# Altium PCB PCB1.PcbDoc
Units mil, origin at the board's own origin, x right, y up, seen from the top; angles counter-clockwise.
Board outline 1940 x 1145 mil, 2 copper layers (Top Layer, Bottom Layer); 9 components, 11 nets, 35 pads, 1 vias.
Unrouted connection lines stored in the file: 4.
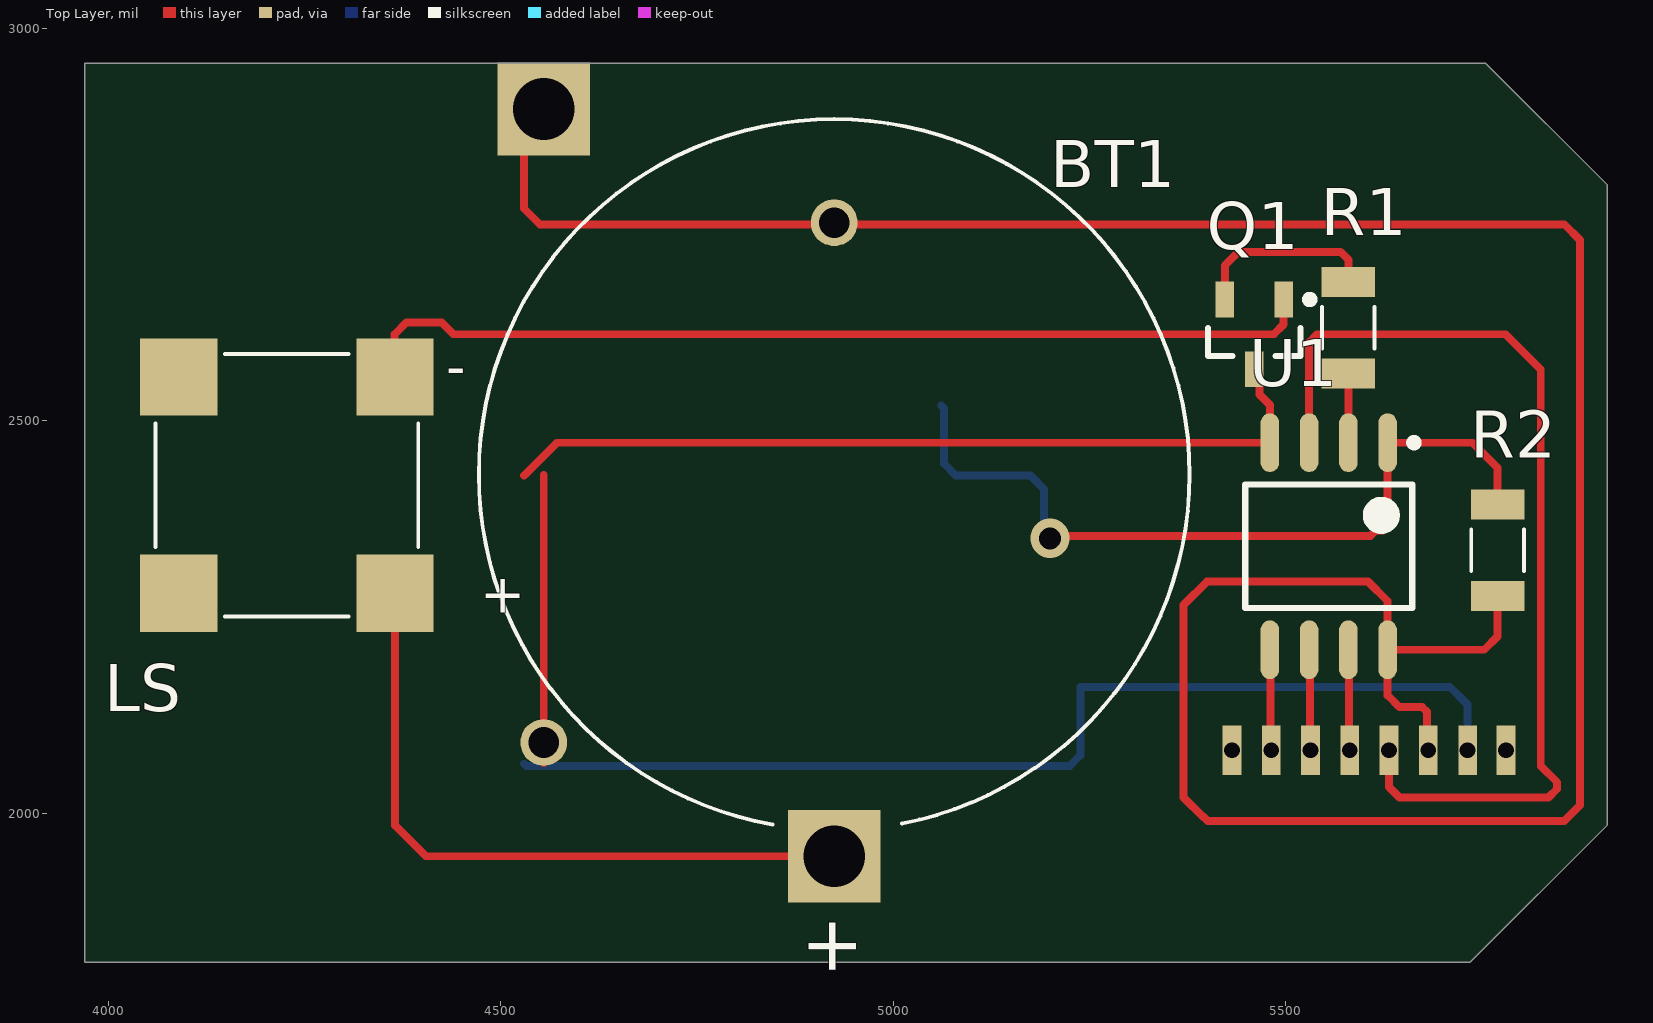
[diagram p0: Top Layer view]
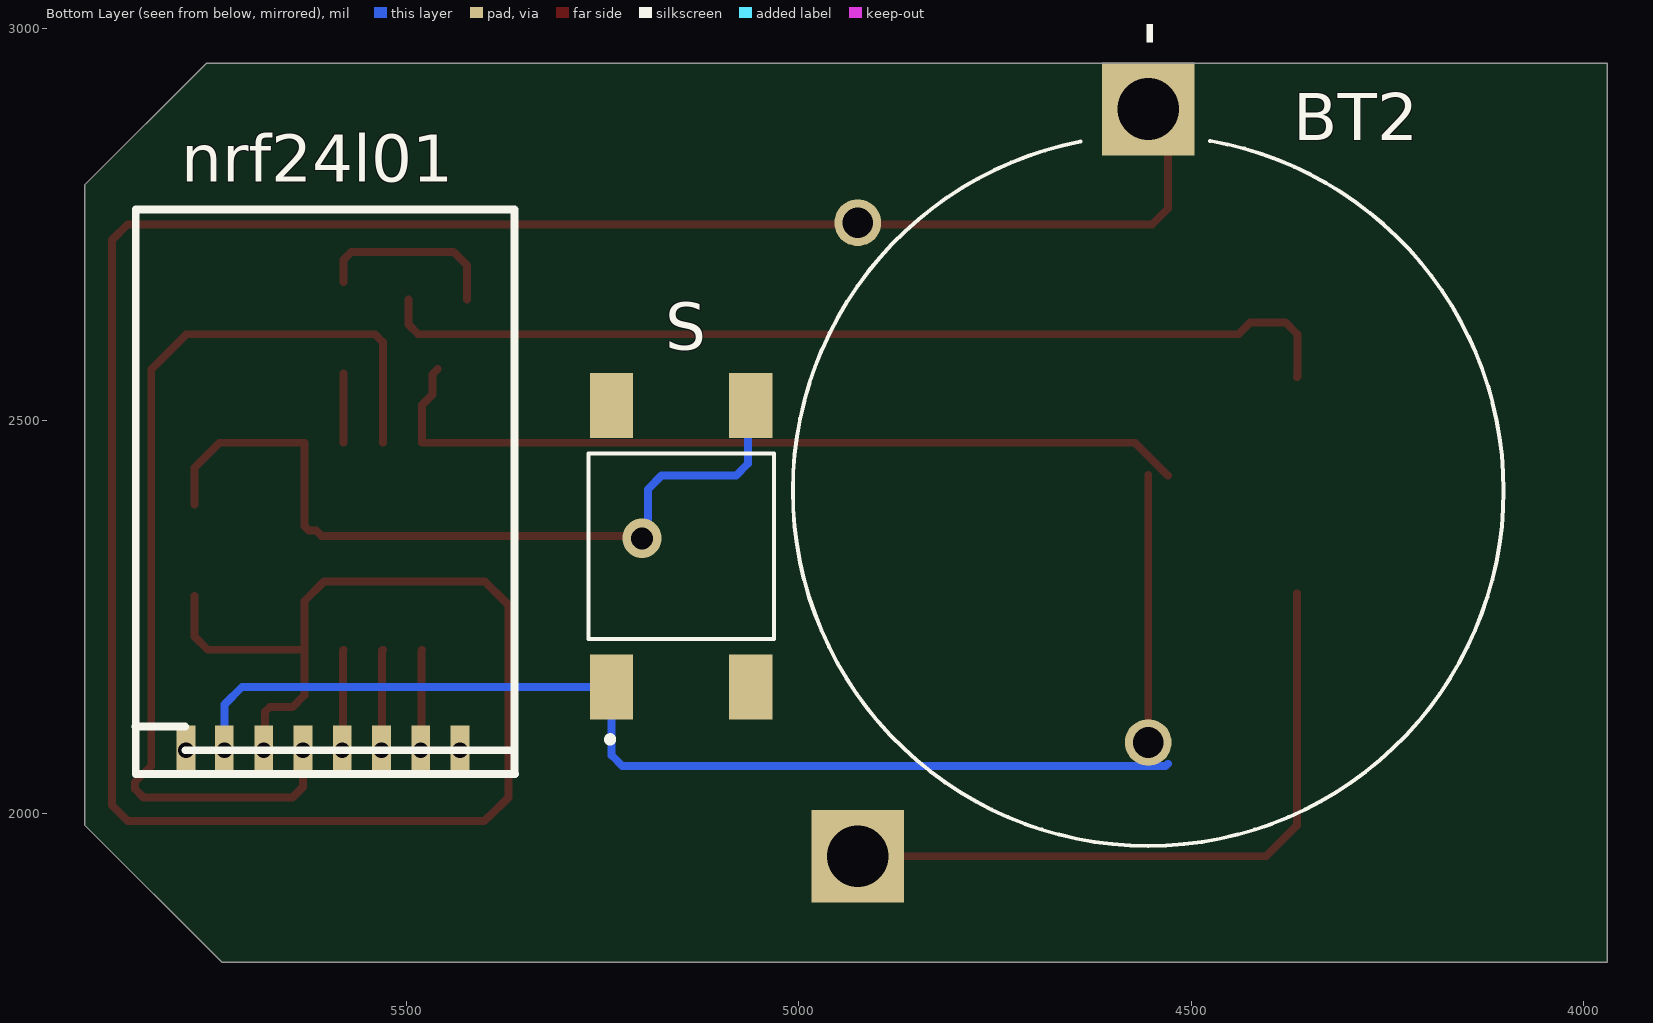
[diagram p1: Bottom Layer view, seen from below]
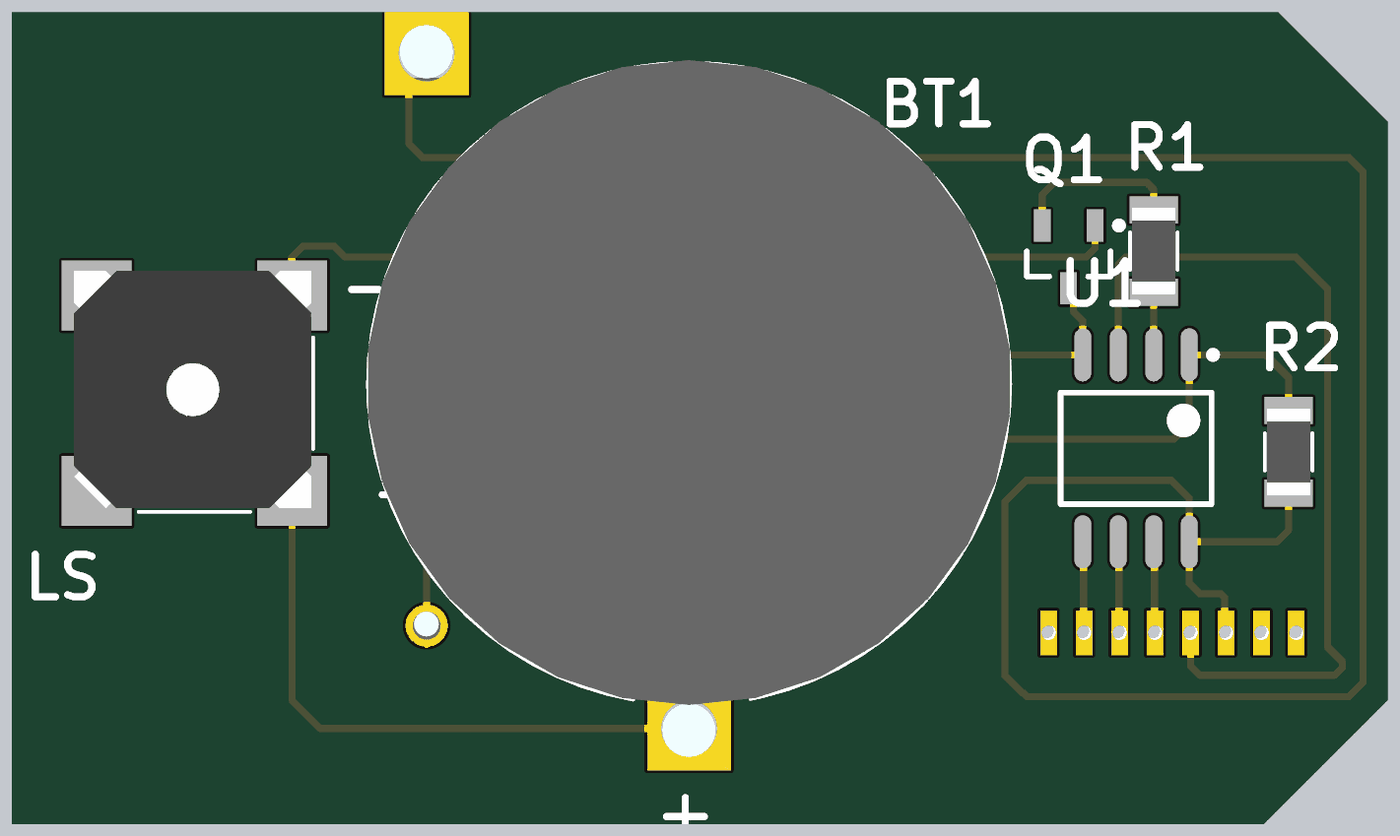
[diagram p2: 3D render of the assembled board from above, using the file's embedded part models]
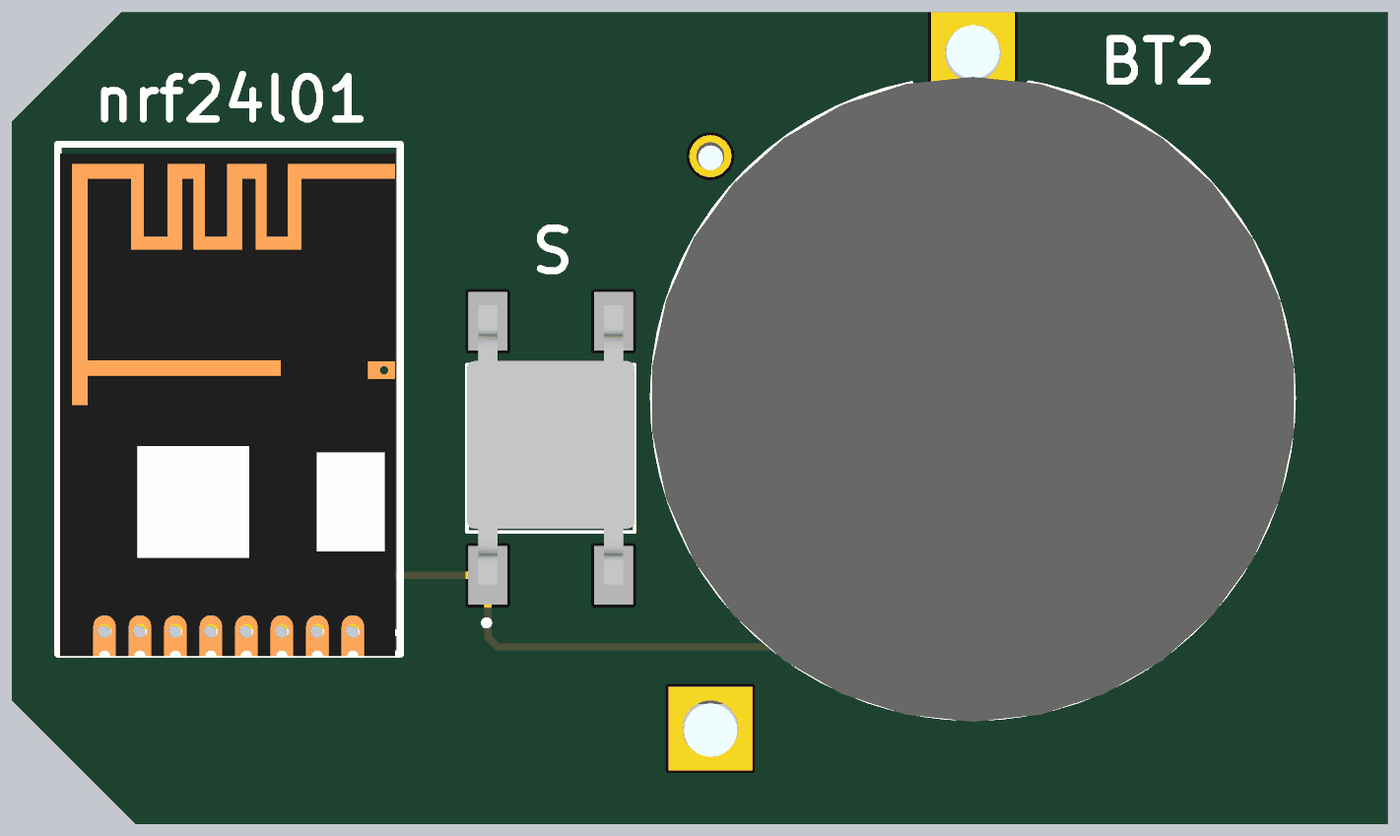
[diagram p3: 3D render of the assembled board from below, using the file's embedded part models]

## Layer stack, top to bottom
Top Solder: solder mask 0.4, Solder Resist, Dk 3.5
Top Layer: signal copper 1.4
Dielectric 1: dielectric 12.6, FR-4, Dk 4.8
Bottom Layer: signal copper 1.4
Bottom Solder: solder mask 0.4, Solder Resist, Dk 3.5

## Board outline
3970,1810 3970,2955 5755,2955 5910,2800 5910,1985 5735,1810

## Design rules (kind name [scope] priority, off if disabled: settings)
Clearance [All] p1: gap=10 ignorepadtopadclearanceinfootprint=FALSE except(0: Arc-Hole Track-Hole SMDPad-Hole THPad-Hole Via-Hole Fill-Hole Poly-Hole Region-Hole Text-Hole)
PolygonConnect [All] p1: connectstyle=Relief reliefconductorwidth=10 reliefentries=4 polygonreliefangle="90 Angle" airgapwidth=10
RoutingVias [All] p1: holewidth=28 width=50 viastyle="Through Hole" minholewidth=28 minwidth=50 maxholewidth=28 maxwidth=50
SolderMaskExpansion [All] p1: expansion=4 istentingtop=FALSE
Width [All] p1: maxlimit=10 minlimit=10 preferedwidth=10
30 further rules are at their usual default settings.

## Components (designator, comment, footprint, x,y, rotation, side; value= is the part's Value field where it differs from the comment)
BT1 "VL-2320/HFN" BAT_VL-2320/HFN 4925,2431.22 r270 top
BT2 "VL-2320/HFN" BAT_VL-2320/HFN 4555,2410.87 r90 bottom
LS "CMT-8530S-SMT" CUI_CMT-8530S-SMT 4227.8,2417.8 r0 top
nrf24l01 "SMD" NRF24L01 5781.74,2050 r90 bottom
Q1 "QNPN" SOT-23B_N 5460,2610 r270 top
R1 "RC1206JR-0713RL" RESC3116X65N 5580,2618.27 r90 top
R2 "RC1206JR-0713RL" RESC3116X65N 5770,2335 r270 top
S "1571527-1" SW_1571527-1 5150,2340 r90 bottom
U1 "ATtiny85-20SU" 8S2_L 5555,2340 r270 top

## Footprints (in the part's own frame and the unit in brackets; to place one, negate y for a bottom-side part, rotate by r counter-clockwise, add the part's x,y. Pads: shape width x height; smd on the part's side, far side on the other; paste and mask are expansions set on the pad)
8S2_L [mm] "SOP, 8-Leads, Body 5.3x5.3mm, Pitch 1.27mm, IPC High Density"
  oval 1.9x0.6 smd: 1(-3.35,1.905) 2(-3.35,0.635) 3(-3.35,-0.635) 4(-3.35,-1.905) 5(3.35,-1.905) 6(3.35,-0.635) 7(3.35,0.635) 8(3.35,1.905)
  silkscreen extent -3.47,-2.7 2,2.88, body extent -2.7,-2.68 2.7,2.68, height 2.16
BAT_VL-2320/HFN [mm]
  round 1.508 hole 1: N(-8.15,0)
  rect 3x3 hole 2: P(12.35,0)
  silkscreen extent -11.5,-11.5 11.32,11.5, body extent -11.59,-11.56 13.37,11.54, height 4.18
CUI_CMT-8530S-SMT [mm]
  rect 2.5x2.5 smd: 1(-3.5,3.5) 2(-3.5,-3.5) N(3.5,3.5) P(3.5,-3.5)
  silkscreen extent -4.25,-4.25 4.25,4.25, body extent -4.31,-4.12 4.19,4.38, height 3.06
NRF24L01 [mil] "smd"
  rect 62.99x23.62 hole 20: 1(30,-1) 2(30,-49.99) 3(30,-100) 4(30,-150) 5(30,-200) 6(30,-250) 7(30,-300) 8(30,-350)
  silkscreen extent 0,-420 719,63, body extent -3,-412 706,60, height 32
RESC3116X65N [mm]
  rect 0.97x1.73 smd: 1(-1.48,0) 2(1.48,0)
  silkscreen extent -0.67,-0.85 0.67,0.85, body extent -1.55,-0.78 1.55,0.77, height 0.65
SOT-23B_N [mm] "SOT23, 3-Leads, Body 2.9x1.3mm, Pitch 0.95mm, Lead Span 2.4mm, IPC Medium Density"
  rect 1.15x0.6 smd: 1(-1.125,0.95) 2(-1.125,-0.95) 3(1.125,0)
  silkscreen extent -1.25,-1.5 0.7,1.93, body extent -0.7,-1.5 0.7,1.5, height 1.14
SW_1571527-1 [mm]
  rect 2.1x1.4 smd: 1(-4.55,2.25) 2(4.55,2.25) 3(-4.55,-2.25) 4(4.55,-2.25)
  silkscreen extent -6.35,-3 3,3, body extent -4.87,-3 5.13,3, height 4.27

## Part data
BT1 BT2: "Battery; Lithium; Coin Cell; 3V; 30 MAH; 2 Pin Horizontal Leads; Rechargeable", Package=None, Availability=Unavailable, MP=VL-2320/HFN, Price=None
LS: "8.5 mm, 3.6 Vo-p, 90 dB, Surface Mount _SMT_, Magnetic Audio Transducer Buzzer", Package=CUI, Availability=Unavailable, CUI_purchase_URL=https://www.cuidevices.com/product/audio/buzzers/audio-transducers/cmt-8530s-smt-tr?utm_source=snapeda.com&utm_medium=referral&utm_campaign=snapedaBOM, MF="CUI Devices", MP=CMT-8530S-SMT-TR, Price=None, SnapEDA_Link=https://www.snapeda.com/parts/CMT-8530S-SMT-TR/CUI%20Devices/view-part/649163/?ref=snap
nrf24l01: library part nrf24l01_smd, Supplier Part Number 1=311-0.0ERCT-ND, Supplier 1=Digi-Key
Q1: "NPN Bipolar Transistor", LatestRevisionDate=29-May-2009, LatestRevisionNote="IPC-7351 Footprint Added.", PackageDescription="3-Pin SOT-23 Package 0.95 mm Pitch, 2.4 mm Lead Span", PackageReference=SOT-23B, PackageVersion=Aug-1999, Published=8-Jun-2000, Publisher="Altium Limited"
R1 R2: "13 Ohms Â±5% 0.25W, 1/4W Chip Resistor 1206 _3216 Metric_ Moisture Resistant Thick Film", Package="3116 Yageo", Availability=Unavailable, MF=Yageo, MP=RC1206JR-0713RL, Price=None, SnapEDA_Link=https://www.snapeda.com/parts/RC1206JR-0713RL/Yageo/view-part/105893/?ref=snap
S: "Switch Tactile OFF _ON_ Round Button Gull Wing 0.05A 12VDC 0.98N SMD Bulk", Package="SMD-6 Omron Electronics", Availability=Unavailable, EU_RoHS_Compliance=Compliant, MF="TE Connectivity", MP=1571527-1, Price=None, SnapEDA_Link=https://www.snapeda.com/parts/1571527-1/TE%20Connectivity/view-part/244428/?ref=snap, TE_purchase_URL=https://www.te.com/usa-en/product-1571527-1.html?te_bu=Cor&te_type=disp&te_campaign=seda_glo_cor-seda-global-disp-prtnr-fy19-seda-model-bom-cta_sma-317_1&elqCampaignId=32493
U1: library part ATTINY85-20SU, "8-bit AVR Microcontroller, 20MHz, 2.7-5.5V, 8K Flash, 512 Bytes EEPROM, 512 Bytes SRAM, Industrial Grade (-40°C to 85°C), 8-Lead SOIC, Pb-Free", ComponentLink1Description="Manufacturer URL", ComponentLink1URL=http://www.atmel.com/, ComponentLink2Description="ATtiny25/45/85 Datasheet", ComponentLink2URL=http://www.atmel.com/dyn/resources/prod_documents/doc2586.pdf, ComponentLink3Description="ATtiny25/45/85 Summary", ComponentLink3URL=http://www.atmel.com/dyn/resources/prod_documents/2586S.pdf, DatasheetVersion="revN, Apr-2011", PackageDescription="8-Lead, 0.208\" Body, Plastic Small Outline Package (EIAJ)", PackageReference=8S2, PackageVersion="revF, Apr-2008", PartNumber=ATTINY85-20SU, RevisionNote="DatasheetVersion updated. URLs added."

## Via types
v1: diameter 50, hole 28, Top Layer to Bottom Layer, 1 vias

## Nets (pads, with @x,y where several pads share a name; then routed paths per layer and width w, separated by ;. In a path a pad name is that pad's centre, name@x,y a point inside that pad or via, vN(x,y) a via of type N, cw(c..) or ccw(c..) an arc to the next point about the centre after c; other vN are vias at no path point)
GND: BT2.N nrf24l01.2 Q1.3 S.1 S.2 U1.4 | length 3503.5
  Top Layer w10: 4530,2430 4571.89,2471.89 U1.4 5480,2520 5466.81,2533.19 5466.81,2558.9 Q1.3 ; BT2.N@4555,2063.78 4555,2430.87 ; 4555,2430.87 4555,2420 4555,2079.13 4555,2430.87
  Bottom Layer w10: 4530,2062.91 4532.91,2060 5225,2060 5238.58,2073.58 S.1 5709.13,2160.87 5731.74,2138.26 nrf24l01.2
NetBT1_N: BT1.N BT2.P nrf24l01.1 nrf24l01.3 R2.2 U1.8 | length 3662.3
  Top Layer w10: BT2.P@4530,2870 4530,2770 4550,2750 4885,2750 4925,2750 5855,2750 5875,2730 5875,2010 5855,1990 5400.86,1990 5395.86,1995 5395,1995 5370,2020 5370,2265 5400,2295 5605,2295 5630,2270 U1.8 ; nrf24l01.3 5680,2081.74 5680,2129.14 5674.14,2135 5645,2135 5630,2150 U1.8 ; R2.2 5770,2225 5753.11,2208.11 U1.8
NetBT1_P: BT1.P LS.P | length 832.2
  Top Layer w10: LS.P 4365.59,1984.41 4405,1945 4882.91,1945 BT1.P@4885,1942.91
NetLS_N: LS.N Q1.1 | length 1236.5
  Top Layer w10: LS.N 4365,2556.18 4365,2610 4380,2625 4425,2625 4440,2610 5485,2610 5497.4,2622.4 Q1.1
Netnrf24l01_4: nrf24l01.4 U1.3 | length 1259.5
  Top Layer w10: U1.3 5530,2600 5540,2610 5780,2610 5825,2565 5825,2060 5845.86,2039.14 5845.86,2030.86 5835,2020 5645,2020 5631.74,2033.26 nrf24l01.4
Netnrf24l01_5: nrf24l01.5 U1.7 | length 128.8
  Top Layer w10: U1.7 5580.87,2207.24 5580.87,2080.87 nrf24l01.5
Netnrf24l01_6: nrf24l01.6 U1.6 | length 128.8
  Top Layer w10: U1.6 5530.87,2207.24 5530.87,2080.87 nrf24l01.6
Netnrf24l01_7: nrf24l01.7 U1.5 | length 128.8
  Top Layer w10: U1.5 5480.87,2207.24 5480.87,2080.87 nrf24l01.7
NetQ1_2: Q1.2 R1.2 | length 240.5
  Top Layer w10: Q1.2 5422.6,2697.6 5440,2715 5570,2715 5580,2705 R1.2
NetR1_1: R1.1 U1.2 | length 88.1
  Top Layer w10: U1.2 R1.1
NetR2_1: R2.1 S.3 S.4 U1.1 | length 1024.7
  Top Layer w10: v1(5200,2350) 5202.93,2352.93 5607.93,2352.93 5615,2360 5624.14,2360 5630,2365.86 U1.1 5738.11,2471.89 5770,2440 R2.1
  Bottom Layer w10: S.4 5065,2515.55 5065,2445 5080,2430 5175,2430 5192.35,2412.65 5192.35,2357.65 v1(5200,2350)
pads on no net: LS.1 LS.2 nrf24l01.8

## Silkscreen, mask and mechanical layers (free items; w line width, h text height)
Mechanical 1:
  the board outline again, w10

## Text inside footprints (layer, text, board x,y; h text height)
BT1: Top Overlay "+" at 4892.46,1870.78 h70.12 r270; Mechanical 13 "+" at 4892.5,2071.21 h70.03 r270
BT2: Bottom Overlay "+" at 4522.46,2971.3 h70.12 r270; Mechanical 13 "+" at 4522.5,2770.87 h70.03 r270
LS: Top Overlay "-" at 4430.96,2544.58 h50; Top Overlay "+" at 4474.05,2255.07 h50.04